# Altium PCB VESC.PcbDoc (part 3 of 3)
Units mm, origin at the board's own origin, x right, y up, seen from the top; angles counter-clockwise.
Board outline 74.1 x 118 mm, 2 copper layers (Component Side, Bottom Layer), stack 1.571 mm thick; 186 components, 177 nets, 891 pads, 378 vias.
Unrouted connection lines stored in the file: 5.
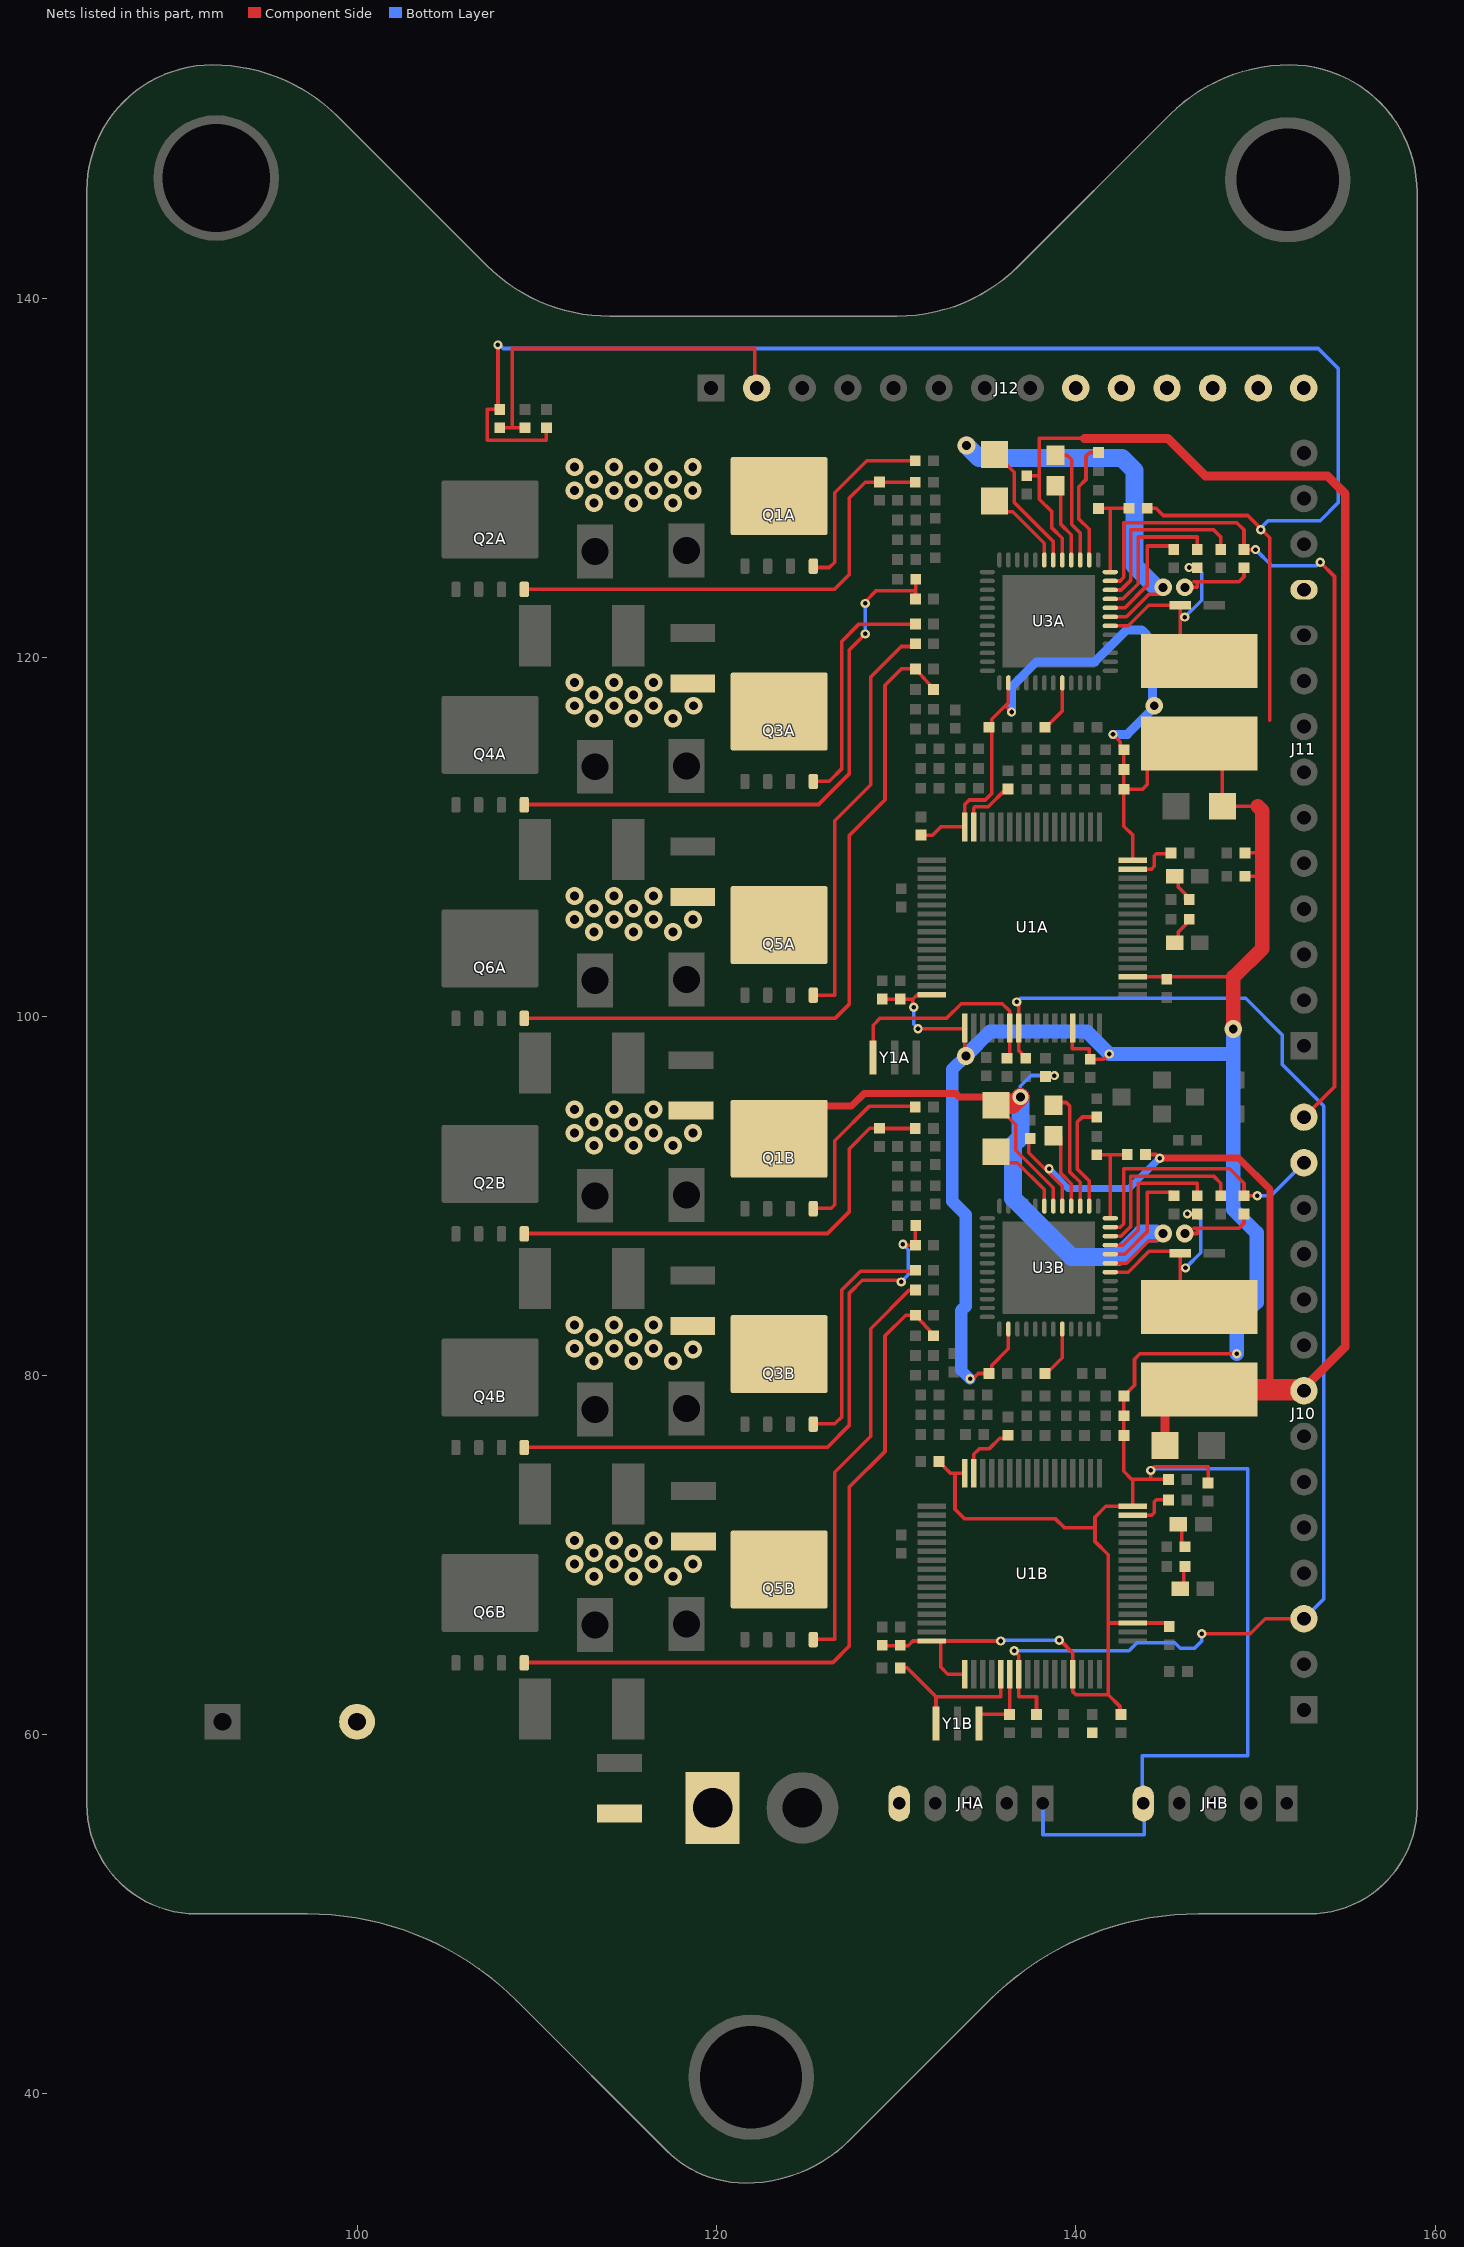
[diagram p3: the nets of this part, all layers, seen from the top]

## Via types
v1: diameter 0.52, hole 0.254, Component Side to Bottom Layer, tented both sides, 205 vias
v2: diameter 1, hole 0.5, Component Side to Bottom Layer, tented both sides, 170 vias
v3: diameter 0.9, hole 0.5, Component Side to Bottom Layer, tented both sides, 3 vias

## Nets (pads, with @x,y where several pads share a name; then routed paths per layer and width w, separated by ;. In a path a pad name is that pad's centre, name@x,y a point inside that pad or via, vN(x,y) a via of type N, cw(c..) or ccw(c..) an arc to the next point about the centre after c; other vN are vias at no path point) (continued)
NetC1B_1: C1B.1 U1B.5 Y1B.3 | length 9.2
  Component Side w0.2: C1B.1@130.208,63.7 130.6,63.7 132.2,62.1 ; Y1B.3@132.2,60.4 132.2,62.1 ; U1B.5@135.81,63.35 135.81,62.1 132.2,62.1
NetC2A_1: C2A.1 U1A.6 Y1A.1 | length 12.7
  Component Side w0.2: Y1A.1@128.7,97.4 128.7,99.5 129.1,99.9 132.8,99.9 133.6,100.7 135.9,100.7 136.31,100.29 U1A.6@136.31,99.35 136.31,98.008 ; C2A.1@136.21,97.808 C2A.1@136.26,97.758
NetC2B_1: C2B.1 U1B.6 Y1B.1 | length 4.4
  Component Side w0.2: Y1B.1@134.6,60.65 134.6,61.108 C2B.1@136.3,61.108 ; C2B.1@136.31,61.108 U1B.6@136.31,63.35
NetC11A_1: C11A.1 U1A.31 | length 2.6
  Component Side w0.2: U1A.31@143.16,108.2 144.21,108.2 144.36,108.35 144.36,108.95 144.468,109.058 C11A.1@145.06,109.058
NetC11B_1: C11B.1 U1B.31 | length 2.6
  Component Side w0.2: U1B.31@143.16,72.2 144.21,72.2 144.36,72.35 144.36,72.95 144.468,73.058 C11B.1@145.06,73.058
NetC18A_1: C18A.1 U3A.2 | length 6.9
  Component Side w0.2: U3A.2@140.735,125.425 140.735,127.125 140.16,127.7 140.16,129.5 140.56,129.9 140.56,131.208 140.76,131.408 C18A.1@141.16,131.408
NetC18B_1: C18B.1 U3B.2 | length 7
  Component Side w0.2: 140.735,90.25 U3B.2@140.735,89.425 140.735,90.825 140.06,91.5 140.06,94.092 140.36,94.392 C18B.1@141.16,94.392
NetC19A_1: C19A.1 U3A.3 | length 6.8
  Component Side w0.2: C19A.1@138.86,131.25 139.51,131.25 139.76,131 139.76,127.4 140.235,126.925 U3A.3@140.235,125.425
NetC19A_2: C19A.2 U3A.4 | length 4.4
  Component Side w0.2: C19A.2@139.16,129.55 139.16,127.4 139.735,126.825 U3A.4@139.735,125.425
NetC19B_1: C19B.1 U3B.3 | length 6.8
  Component Side w0.2: C19B.1@138.76,95.2 139.46,95.2 139.66,95 139.66,91.325 140.235,90.75 U3B.3@140.235,89.425
NetC19B_2: C19B.2 U3B.4 | length 4.1
  Component Side w0.2: C19B.2@139.16,93.3 139.16,91.242 139.735,90.667 U3B.4@139.735,89.425
NetC20A_2: C20A.2 U3A.7 | length 4.5
  Component Side w0.2: C20A.2@135.552,128.455 135.907,128.1 136.485,128.1 138.235,126.35 U3A.7@138.235,125.425
NetC20B_2: C20B.2 U3B.7 | length 4.5
  Component Side w0.2: C20B.2@135.552,92.455 136.157,91.85 136.735,91.85 138.235,90.35 U3B.7@138.235,89.425
NetC21A_1: C21A.1 U3A.45 | length 9
  Component Side w0.2: U3A.45@141.91,123.25 142.61,123.25 143.46,124.1 143.46,126.7 146.76,126.7 ; C21A.1@146.76,126 146.76,126.7 ; C21A.1@146.76,126.2 146.76,126.7
NetC21A_2: C21A.2 D3A.2 L1A.1 U3A.42 | length 9.8
  Component Side w0.2: U3A.42@141.91,121.75 142.91,121.75 144.06,122.9 D3A.2@145.81,122.9 L1A.1@145.81,121.15
  Bottom Layer w0.2: v1(146.06,122.24) 147,123.18 147,124.7 146.7,125 v1(146.3,125)
NetC21B_1: C21B.1 U3B.45 | length 9
  Component Side w0.2: U3B.45@141.91,87.25 142.61,87.25 143.46,88.1 143.46,90.7 146.76,90.7 ; C21B.1@146.76,90 146.76,90.7 ; C21B.1@146.76,90.2 146.76,90.7
NetC21B_2: C21B.2 D3B.2 L1B.1 U3B.42 | length 10.6
  Component Side w0.2: U3B.42@141.91,85.75 142.91,85.75 144.06,86.9 145.81,86.9 L1B.1@145.81,85.15 ; v1@146.2,89.1 146.308,88.992 C21B.2@146.76,88.992
  Bottom Layer w0.2: v1(146.1,85.98) 146.95,86.83 146.95,88.65 146.61,88.99 v1(146.21,88.99)
NetC22A_2: C22A.2 U3A.44 | length 6.5
  Component Side w0.2: U3A.44@141.91,122.75 142.71,122.75 143.96,124 143.96,126.2 145.36,126.2 C22A.2@145.56,126
NetC22B_2: C22B.2 U3B.44 | length 6.5
  Component Side w0.2: U3B.44@141.91,86.75 142.71,86.75 143.96,88 143.96,90.2 145.36,90.2 C22B.2@145.56,90
NetC30A_1: C30A.1 U1A.47 | length 3.4
  Component Side w0.2: U1A.47@134.31,110.55 134.31,111.6 134.376,111.666 135.11,111.666 136.102,112.658 C30A.1@136.21,112.658
NetC30B_1: C30B.1 U1B.47 | length 3.4
  Component Side w0.2: U1B.47@134.31,74.55 134.31,75.6 134.61,75.9 135.15,75.9 135.75,76.5 136.052,76.5 C30B.1@136.21,76.658
NetD1A_1: D1A.1 R32A.1 | length 1.1
  Component Side w0.2: D1A.1@145.56,104.35 145.7,104.49 145.7,104.7 R32A.1@146.209,105.209
NetD1B_1: D1B.1 R32B.1 | length 0.9
  Component Side w0.2: D1B.1@146,68.45 146,69.19 146.068,69.258 R32B.1@146.068,69.35
NetD2A_1: D2A.1 R31A.1 | length 1.3
  Component Side w0.2: D2A.1@145.7,107.6 145.7,107.2 146.1,106.8 R31A.1@146.1,106.482
NetD2B_1: D2B.1 R31B.1 | length 1.5
  Component Side w0.2: D2B.1@145.56,71.55 145.9,71.55 145.9,70.618 R31B.1@146.068,70.45
NetQ1A_4: Q1A.4 R1A.2 | length 10.4
  Component Side w0.2: Q1A.4@125.365,125 126.26,125 126.56,125.3 126.56,129.16 128.35,130.95 R1A.2@131.044,130.95 R1A.2@131.052,130.95
NetQ1B_4: Q1B.4 R1B.2 | length 10.5
  Component Side w0.2: Q1B.4@125.365,88.98 Q1B.4@125.365,89.28 125.385,89.3 126.36,89.3 126.56,89.5 126.56,93.06 128.5,95 130.994,95 R1B.2@131.044,94.95 R1B.2@131.052,94.95
NetQ2A_4: Q2A.4 R2A.2 R7A.2 | length 26.8
  Component Side w0.2: Q2A.4@109.265,123.7 109.365,123.8 126.56,123.8 127.36,124.6 127.36,128.86 128.258,129.758 R7A.2@129.052,129.758 129.06,129.75 R2A.2@131.044,129.75
NetQ2B_4: Q2B.4 R2B.2 R7B.2 | length 26.6
  Component Side w0.2: Q2B.4@109.265,87.6 109.265,87.9 126.16,87.9 127.36,89.1 127.36,92.6 128.518,93.758 R7B.2@129.052,93.758 129.06,93.75 R2B.2@131.044,93.75
NetQ3A_4: Q3A.4 R3A.2 | length 13.7
  Component Side w0.2: Q3A.4@125.365,112.98 125.485,113.1 126.26,113.1 126.96,113.8 126.96,120.9 127.91,121.85 R3A.2@131.052,121.85 R3A.2@131.152,121.95
NetQ3B_4: Q3B.4 R3B.2 | length 13.8
  Component Side w0.2: Q3B.4@125.365,76.98 125.365,77.3 126.56,77.3 126.96,77.7 126.96,84.76 128,85.8 R3B.2@131.002,85.8 ; R3B.2@131.052,85.85 R3B.2@131.152,85.95
NetQ4A_4: Q4A.4 R4A.2 R8A.2 | length 33.3
  Component Side w0.2: Q4A.4@109.265,111.8 125.66,111.8 127.36,113.5 127.36,120.4 v1(128.26,121.3) ; v1@128.26,123.1 128.86,123.7 131.052,123.7 R4A.2@131.052,123.25 131.068,123.25 R8A.2@131.068,124.35
  Bottom Layer w0.2: v1(128.26,121.3) v1(128.26,123)
NetQ4B_4: Q4B.4 R4B.2 R8B.2 | length 33.6
  Component Side w0.2: Q4B.4@109.265,75.8 109.465,76 126.16,76 127.36,77.2 127.36,84.56 128.1,85.3 130.16,85.3 v1(130.26,85.2) v1@130.26,85.1 ; v1@130.36,87.2 130.41,87.25 R4B.2@131.052,87.25 131.052,88.334 R8B.2@131.068,88.35
  Bottom Layer w0.2: v1(130.26,85.2) 130.66,85.6 130.66,87 v1(130.36,87.3)
NetQ5A_4: Q5A.4 R5A.2 | length 23.1
  Component Side w0.2: Q5A.4@125.365,101.18 126.56,101.18 126.56,110.9 128.56,112.9 128.56,118.9 130.26,120.6 131.102,120.6 R5A.2@131.152,120.65
NetQ5B_4: Q5B.4 R5B.2 | length 22.9
  Component Side w0.2: Q5B.4@125.365,65.18 125.485,65.3 126.56,65.3 126.56,74.6 128.56,76.6 128.56,82.6 130.71,84.75 R5B.2@131.052,84.75 ; R5B.2@131.052,84.65 R5B.2@131.152,84.65
NetQ6A_4: Q6A.4 R6A.2 R9A.2 | length 40.3
  Component Side w0.2: Q6A.4@109.265,99.9 110.36,99.9 126.6,99.9 127.36,100.66 127.36,110.06 129.36,112.06 129.36,118.45 130.26,119.35 130.752,119.35 ; R6A.2@131.068,119.333 R9A.2@132.06,118.25
NetQ6B_4: Q6B.4 R6B.2 R9B.2 | length 40.3
  Component Side w0.2: Q6B.4@109.265,63.9 109.365,64 126.46,64 127.36,64.9 127.36,73.76 129.36,75.76 129.36,82.2 130.51,83.35 R6B.2@131.052,83.35 131.068,83.333 R9B.2@132.06,82.25
NetR33A_2: R33A.2 R34A.1 U3A.48 | length 5.2
  Component Side w0.2: R33A.2@141.26,128.3 141.91,128.3 ; U3A.48@141.91,124.75 141.91,128.3 ; R34A.1@142.952,128.3 141.91,128.3
NetR33B_2: R33B.2 R34B.1 U3B.48 | length 5.4
  Component Side w0.2: R33B.2@141.06,92.292 R34B.1@142.852,92.292 ; U3B.48@141.91,88.75 141.91,92.2 ; R34B.1@142.852,92.2 R34B.1@142.952,92.3
NetR36A_1: R36A.1 U3A.46 | length 10
  Component Side w0.2: U3A.46@141.91,123.75 142.51,123.75 143.06,124.3 143.06,127.1 147.66,127.1 148.06,126.7 R36A.1@148.06,126
NetR36B_1: R36B.1 U3B.46 | length 10
  Component Side w0.2: U3B.46@141.91,87.75 142.51,87.75 143.06,88.3 143.06,91.1 147.66,91.1 148.06,90.7 R36B.1@148.06,90
NetR37A_1: R37A.1 U3A.32 | length 2.9
  Component Side w0.2: R37A.1@138.276,116.05 138.918,116.692 139.235,117.009 U3A.32@139.235,118.575
NetR37B_1: R37B.1 U3B.32 | length 3
  Component Side w0.2: R37B.1@138.276,80.05 138.276,80.2 138.46,80.2 139.235,80.975 U3B.32@139.235,82.575
NRST: C3A.1 C3B.1 J10.3 U1A.7 U1B.7 | length 75.4
  Component Side w0.2: v1@136.6,64.6 136.81,64.39 U1B.7@136.81,63.35 136.81,62.1 137.8,62.1 C3B.1@137.8,61.108 ; v1(136.7,100.8) 136.81,100.69 U1A.7@136.81,99.35 136.81,98.09 137.142,97.758 C3A.1@137.36,97.758 ; U1B.7@136.802,63.65 U1B.7@136.802,63.825 ; U1A.7@136.802,99.65 U1A.7@136.802,99.825 ; v1(147,65.6) 149.7,65.6 150.54,66.44 J10.3@152.7,66.44
  Bottom Layer w0.2: v1(136.56,64.65) 142.95,64.65 143.4,65.1 145.5,65.1 145.8,64.8 146.6,64.8 147,65.2 v1(147,65.6) ; v1(136.7,100.8) 136.9,101 149.45,101 151.5,98.95 151.5,97.3 153.8,95 153.8,67.54 J10.3@152.7,66.44
NTC_M: J12.2 R10.1 R11.2 | length 21.4
  Component Side w0.2: R10.1@107.9,132.792 108.6,132.792 ; R11.2@109.2,132.792 108.6,132.792 ; J12.2@122.1,135 122.1,137.2 108.6,137.2 108.6,132.792
V_SUPPLY: C20A.1 C20B.1 C35A.2 C35B.2 C36A.2 C36B.2 C37A.2 C37B.2 C39.2 J12.9 J12.10 J12.11 J12.12 J12.13 J12.14 JB.2 Q1A.5 Q1A.6 Q1A.7 Q1A.8 Q1A.9@123.46,128.98 Q1B.5 Q1B.6 Q1B.7 Q1B.8 Q1B.9@123.46,93.18 Q3A.5 Q3A.6 Q3A.7 Q3A.8 Q3A.9@123.46,116.98 Q3B.5 Q3B.6 Q3B.7 Q3B.8 Q3B.9@123.46,81.18 Q5A.5 Q5A.6 Q5A.7 Q5A.8 Q5A.9@123.46,105.08 Q5B.5 Q5B.6 Q5B.7 Q5B.8 Q5B.9@123.46,69.18 R35A.2 R35B.2 R38A.2 R38B.2 U3A.6 U3A.43 U3B.6 U3B.43 | length 90.9
  Component Side w0.2: Q1B.9@124.73,94.45 Q1B.9@125.03,94.45 ; Q1B.5@125.365,94.62 Q1B.5@125.365,94.785 ; Q1A.5@125.365,130.62 Q1A.5@125.365,130.785 ; Q1B.9@125.48,92.88 123.46,92.88 Q1B.9@125.03,94.45 ; Q1B.5@125.58,95 Q1B.9@125.03,94.45 ; Q1B.9@125.845,94.785 Q1B.5@125.365,94.785 ; C20A.1@135.552,131.045 135.815,131.045 136.56,130.3 136.56,128.625 138.735,126.45 U3A.6@138.735,125.425 ; C20B.1@135.554,95.048 136.652,93.95 136.652,92.533 138.735,90.45 U3B.6@138.735,89.425 ; U3B.43@141.91,86.25 142.81,86.25 144.06,87.5 144.46,87.5 ; U3A.43@141.91,122.25 142.81,122.25 144.06,123.5 v2@144.8,123.5 ; v2(146.06,87.9) 146.76,87.9 146.76,88.2 ; v2(146.06,123.9) 146.76,123.9 146.76,124.2 ; 146.56,88.2 146.76,88.2 ; 146.56,124.2 146.76,124.2 ; R35B.2@149.36,88.984 149.36,88.484 149.076,88.2 146.76,88.2 ; R35A.2@149.36,124.984 149.36,124.484 149.076,124.2 146.76,124.2 ; Q1B.9@125.03,94.45 Q1B.5@125.365,94.785 ; Q1A.5@125.365,130.785 123.46,128.88 123.94,128.88 125.845,130.785 Q1A.5@125.365,130.785
  Component Side w0.4: Q1B.5@125.58,95 127.5,95 128.2,95.7 133.3,95.7 133.5,95.5 v3(136.9,95.5)
  Component Side w1: C20B.1@135.554,95.048 C20B.1@135.552,95.045 136.445,95.045 v3(136.9,95.5)
  Bottom Layer w0.2: v3(136.9,95.5) 136.9,96.1 137.5,96.7 v1(138.8,96.7)
  Bottom Layer w1: v2(133.9,131.8) 134.6,131.1 142.56,131.1 143.26,130.4 143.26,125.1 v2@144.46,123.9 ; v3(136.9,95.5) 136.9,93.24 136.5,92.84 136.5,89.86 139.76,86.6 142.36,86.6 143.66,87.9 v2@144.46,87.9
  other v2: 113.16,68.8 115.36,68.8 117.56,68.8 112.06,69.5 114.26,69.5 116.46,69.5 118.66,69.5 113.16,70.1 115.36,70.1 112.06,70.8 114.26,70.8 116.46,70.8 113.16,80.8 115.36,80.8 117.56,80.8 118.66,81.45 112.06,81.5 114.26,81.5 116.46,81.5 113.16,82.1 115.36,82.1 112.06,82.8 114.26,82.8 116.46,82.8 144.86,87.9 113.16,92.8 115.36,92.8 117.56,92.8 112.06,93.5 114.26,93.5 116.46,93.5 118.66,93.5 113.16,94.1 115.36,94.1 112.06,94.8 114.26,94.8 116.46,94.8 113.16,104.7 115.36,104.7 117.56,104.7 112.06,105.4 114.26,105.4 116.46,105.4 118.66,105.4 113.16,106 115.36,106 112.06,106.7 114.26,106.7 116.46,106.7 113.16,116.6 115.36,116.6 117.56,116.6 112.06,117.3 114.26,117.3 116.46,117.3 118.7,117.3 113.16,117.9 115.36,117.9 112.06,118.6 114.26,118.6 116.46,118.6 144.86,123.9 113.16,128.6 115.36,128.6 117.55,128.6 112.06,129.3 114.26,129.3 116.46,129.3 118.65,129.3 113.16,129.9 115.36,129.9 117.55,129.9 112.06,130.6 114.26,130.6 116.46,130.6 118.65,130.6
VCC_3V3: C4A.1 C4B.1 C5A.1 C5B.1 C6A.1 C6B.1 C7A.1 C7B.1 C8A.1 C8B.1 C9A.1 C9B.1 C10.2 C10A.1 C10B.1 C33A.1 C34A.1 C34B.1 J11.11 JHA.5 JHB.5 L1A.2 R10.2 R13A.2 R13B.2 R14A.2 R14B.2 R15A.2 R15B.2 R34A.2 U1A.1 U1A.13 U1A.19 U1A.32 U1A.48 U1A.64 U1B.1 U1B.13 U1B.19 U1B.32 U1B.48 U1B.64 U3A.26 U3B.26 | length 336.2
  Component Side w0.2: v1@107.7,137.5 v1(107.8,137.4) 107.8,133.808 107.2,133.808 107.2,132.1 110.5,132.1 C10.2@110.5,132.792 ; C4B.1@129.21,64.942 130.06,64.942 130.652,64.942 130.91,65.2 U1B.64@131.96,65.2 ; C4A.1@129.21,100.942 C7A.1@130.06,100.942 ; C7A.1@130.21,100.958 130.852,100.958 ; v1@130.91,100.55 130.91,100.958 131.152,101.2 U1A.64@131.26,101.2 ; v1(131.2,99.3) 133.86,99.3 U1A.1@133.81,99.35 v2@133.81,97.85 ; U1A.64@131.24,101.18 U1A.64@131.26,101.2 ; C6A.1@131.36,110.092 132.002,110.092 132.46,110.55 U1A.48@133.81,110.55 133.81,111.8 134.06,112.05 134.95,112.05 135.31,112.41 135.31,115.892 C34A.1@135.06,116.142 ; U1A.64@131.96,101.2 U1A.64@131.26,101.2 ; C6B.1@132.368,75.2 132.368,75.192 133.01,74.55 U1B.48@133.81,74.55 ; 133.26,74.55 133.26,72.54 133.8,72 138.86,72 139.36,71.5 141.06,71.5 ; U1B.1@133.81,63.35 132.86,63.35 132.46,63.75 132.46,65.2 U1B.64@131.96,65.2 ; v1@134.16,79.7 134.56,80.1 C34B.1@135.102,80.1 ; C34A.1@135.068,116.042 135.31,116.284 135.31,116.55 136.06,117.3 ; C34B.1@135.152,80.1 C34B.1@135.126,80.1 ; C34B.1@135.31,79.892 135.127,80.075 135.114,80.088 C34B.1@135.102,80.1 ; v1(135.8,65.2) U1B.64@131.96,65.2 ; U3B.26@136.235,82.575 136.235,81.475 135.31,80.55 135.31,80.284 C34B.1@135.126,80.1 ; U3A.26@136.235,118.575 136.235,117.475 136.06,117.3 ; v1@136.26,117.1 136.06,117.3 ; v1@139.06,65.2 139.16,65.2 139.81,64.55 U1B.13@139.81,63.35 139.81,62.39 140,62.2 141.8,62.2 ; U1A.13@139.802,99.825 139.802,98.2 140.75,98.2 ; C5A.1@140.75,97.658 140.75,98.2 ; v1(141.85,97.9) 141.55,97.6 140.75,97.6 140.75,98.2 ; v1(142.06,115.7) 142.46,115.3 142.46,115.058 R15A.2@142.668,114.85 R14A.2@142.668,113.75 R13A.2@142.668,112.65 ; C5B.1@142.45,61.108 142.45,61.55 141.8,62.2 ; R13A.2@142.66,112.642 R13A.2@142.668,112.65 ; U1A.19@143.16,102.2 144.918,102.2 C8A.1@145.06,102.058 145.202,102.2 148.8,102.2 ; U1A.32@143.16,108.7 143.16,110.1 142.668,110.592 R13A.2@142.668,112.65 ; R34A.2@143.968,128.3 144.46,128.3 144.86,127.9 149.56,127.9 150.8,126.66 150.8,116.5 ; C8B.1@145.06,66.058 144.918,66.2 U1B.19@143.16,66.2 141.8,66.2 ; C9B.1@145.152,74.2 144.16,74.2 ; L1A.2@147.16,115.2 145.26,115.2 143.96,113.9 143.96,112.9 143.71,112.65 R13A.2@142.668,112.65 ; C10B.1@147.36,74.008 147.36,74.9 144.36,74.9 v1(144.16,74.7) 144.16,74.2 ; C33A.1@148.155,111.7 L1A.2@148.155,113.905 ; C33A.1@148.66,111.3 148.66,111.7 150.118,111.7 ; v1(148.96,81.2) 143.56,81.2 143.26,80.9 143.26,79.442 R15B.2@142.668,78.85 R14B.2@142.668,77.75 R13B.2@142.668,76.65 142.66,76.642 142.66,74.65 143.11,74.2 143.21,74.2 ; C9A.1@149.368,107.8 150.368,107.8 ; C10A.1@149.368,109.1 150.268,109.1 ; C34B.1@135.102,80.1 C34B.1@135.126,80.1 ; 141.06,71.5 141.06,70.74 141.8,70 141.8,66.2 ; 141.06,71.5 141.06,72.1 141.66,72.7 U1B.32@143.16,72.7 143.16,74.15 143.21,74.2 ; 141.8,62.2 141.8,66.2 ; 143.21,74.2 144.16,74.2
  Component Side w0.8: v2(148.76,99.3) 148.76,102.2 ; 148.8,102.2 150.368,103.768 150.368,107.8 150.368,111.45 150.118,111.7
  Bottom Layer w0.2: v1(107.8,137.4) 107.9,137.4 108.1,137.2 153.5,137.2 154.6,136.1 154.6,128.6 153.6,127.6 150.7,127.6 v1@150.3,127.2 ; v1(130.96,100.5) 130.96,99.56 131.2,99.32 v1(131.2,99.3) ; v1(135.8,65.2) 135.85,65.25 v1(139.06,65.25) ; 138.16,56.2 138.16,54.4 143.8,54.4 143.8,55.44 143.7,55.54 143.7,58.8 149.56,58.8 149.56,74.8 v1@144.36,74.8 ; v1(144.16,74.7) v1@144.16,74.8
  Bottom Layer w0.5: v1(136.41,116.95) 136.41,118.36 137.8,119.75 141.05,119.75 142.825,121.525 143.66,121.525 144.26,120.925 144.26,117.1 142.86,115.7 v1(142.06,115.7)
  Bottom Layer w0.6: 133.6,80.3 v1(134.1,79.8)
  Bottom Layer w0.7: 133.6,80.3 133.6,83.6 133.86,83.86 133.86,88.94 133.1,89.7 133.1,97.04 v2(133.86,97.8)
  Bottom Layer w0.8: v2(133.86,97.8) 135.21,99.15 140.6,99.15 v1(141.85,97.9) 148.66,97.9 148.76,97.8 ; v2(148.76,99.3) 148.76,97.8 ; v1(148.96,81.2) 148.96,82.96 150.06,84.06 150.06,87.94 148.76,89.24 148.76,97.8
  other v1: 150.3,127.1
  other v2: 144.36,117.3
VCC_3V3_SD: J10.14 R35A.1 U3A.47 | length 48.6
  Component Side w0.2: U3A.47@141.91,124.25 142.46,124.25 142.66,124.45 142.66,127.5 148.96,127.5 149.36,127.1 R35A.1@149.36,126 v1@150.1,126 ; J10.14@152.7,94.38 154.4,96.08 154.4,124.5 v1(153.6,125.3)
  Bottom Layer w0.2: v1(150,126) 150.9,125.1 153.4,125.1 v1(153.6,125.3)
VCC_12V: C33B.1 C38A.1 C38B.1 J10.8 L1B.2 R34B.2 U3A.5 U3B.5 | length 121
  Component Side w0.2: C38A.1@137.26,130.108 137.952,130.108 ; C38B.1@137.36,93.292 137.36,92.4 139.235,90.525 U3B.5@139.235,89.425 ; U3A.5@139.235,125.425 139.235,126.625 138.66,127.2 138.66,128.1 137.96,128.8 137.96,132.2 140.46,132.2 ; R34B.2@143.868,92.3 144.46,92.3 v1(144.66,92.1) ; L1B.2@147.06,79.3 150.8,79.3
  Component Side w0.4: v1(144.66,92.1) 149.06,92.1 150.8,90.36 150.8,79.3
  Component Side w0.5: 140.46,132.2 145.1,132.2 147.2,130.1 154,130.1 155,129.1 155,81.59 J10.8@152.71,79.3 ; C33B.1@144.965,76.3 L1B.2@144.965,79.3 ; J10.8@152.17,79.3 J10.8@152.71,79.3 ; J10.8@152.6,79.19 J10.8@152.71,79.3
  Component Side w1.2: L1B.2@146.87,79.19 J10.8@152.6,79.19
  Bottom Layer w0.4: v1@138.48,91.48 139.56,90.4 142.96,90.4 v1(144.66,92.1)
  other v1: 138.5,91.5
VCC_12V_SD: J10.13 R35B.1 U3B.47 | length 15.5
  Component Side w0.2: U3B.47@141.91,88.25 142.46,88.25 142.66,88.45 142.66,91.5 148.56,91.5 149.36,90.7 R35B.1@149.36,90.008 ; R35B.1@149.36,90 R35B.1@149.36,90.008 ; v1@149.908,90.008 R35B.1@149.36,90.008
  Bottom Layer w0.2: v1(150.1,90) 150.86,90 J10.13@152.7,91.84
pads on no net: Q1A.9@121.087,127.07 Q1A.9@122.13,127.365 Q1A.9@122.13,128.515 Q1A.9@122.13,129.665 Q1A.9@123.46,127.365 Q1A.9@123.46,128.65 Q1A.9@123.46,128.515 Q1A.9@123.46,129.665 Q1A.9@124.79,127.365 Q1A.9@124.79,128.515 Q1A.9@124.79,129.665 Q1A.9@125.832,127.07 Q1B.9@121.087,91.27 Q1B.9@122.13,91.565 Q1B.9@122.13,92.715 Q1B.9@122.13,93.865 Q1B.9@123.46,91.565 Q1B.9@123.46,92.85 Q1B.9@123.46,92.715 Q1B.9@123.46,93.865 Q1B.9@124.79,91.565 Q1B.9@124.79,92.715 Q1B.9@124.79,93.865 Q1B.9@125.832,91.27 Q2A.9@104.988,125.77 Q2A.9@106.03,126.065 Q2A.9@106.03,127.215 Q2A.9@106.03,128.365 Q2A.9@107.36,126.065 Q2A.9@107.36,127.35 Q2A.9@107.36,127.215 Q2A.9@107.36,128.365 Q2A.9@108.69,126.065 Q2A.9@108.69,127.215 Q2A.9@108.69,128.365 Q2A.9@109.733,125.77 Q2B.9@104.988,89.87 Q2B.9@106.03,90.165 Q2B.9@106.03,91.315 Q2B.9@106.03,92.465 Q2B.9@107.36,90.165 Q2B.9@107.36,91.45 Q2B.9@107.36,91.315 Q2B.9@107.36,92.465 Q2B.9@108.69,90.165 Q2B.9@108.69,91.315 Q2B.9@108.69,92.465 Q2B.9@109.733,89.87 Q3A.9@121.087,115.07 Q3A.9@122.13,115.365 Q3A.9@122.13,116.515 Q3A.9@122.13,117.665 Q3A.9@123.46,115.365 Q3A.9@123.46,116.65 Q3A.9@123.46,116.515 Q3A.9@123.46,117.665 Q3A.9@124.79,115.365 Q3A.9@124.79,116.515 Q3A.9@124.79,117.665 Q3A.9@125.832,115.07 Q3B.9@121.087,79.27 Q3B.9@122.13,79.565 Q3B.9@122.13,80.715 Q3B.9@122.13,81.865 Q3B.9@123.46,79.565 Q3B.9@123.46,80.85 Q3B.9@123.46,80.715 Q3B.9@123.46,81.865 Q3B.9@124.79,79.565 Q3B.9@124.79,80.715 Q3B.9@124.79,81.865 Q3B.9@125.832,79.27 Q4A.9@104.988,113.77 Q4A.9@106.03,114.065 Q4A.9@106.03,115.215 Q4A.9@106.03,116.365 Q4A.9@107.36,114.065 Q4A.9@107.36,115.35 Q4A.9@107.36,115.215 Q4A.9@107.36,116.365 Q4A.9@108.69,114.065 Q4A.9@108.69,115.215 Q4A.9@108.69,116.365 Q4A.9@109.733,113.77 Q4B.9@104.988,77.97 Q4B.9@106.03,78.265 Q4B.9@106.03,79.415 Q4B.9@106.03,80.565 Q4B.9@107.36,78.265 Q4B.9@107.36,79.55 Q4B.9@107.36,79.415 Q4B.9@107.36,80.565 Q4B.9@108.69,78.265 Q4B.9@108.69,79.415 Q4B.9@108.69,80.565 Q4B.9@109.733,77.97 Q5A.9@121.087,103.17 Q5A.9@122.13,103.465 Q5A.9@122.13,104.615 Q5A.9@122.13,105.765 Q5A.9@123.46,103.465 Q5A.9@123.46,104.75 Q5A.9@123.46,104.615 Q5A.9@123.46,105.765 Q5A.9@124.79,103.465 Q5A.9@124.79,104.615 Q5A.9@124.79,105.765 Q5A.9@125.832,103.17 Q5B.9@121.087,67.27 Q5B.9@122.13,67.565 Q5B.9@122.13,68.715 Q5B.9@122.13,69.865 Q5B.9@123.46,67.565 Q5B.9@123.46,68.85 Q5B.9@123.46,68.715 Q5B.9@123.46,69.865 Q5B.9@124.79,67.565 Q5B.9@124.79,68.715 Q5B.9@124.79,69.865 Q5B.9@125.832,67.27 Q6A.9@104.988,101.87 Q6A.9@106.03,102.165 Q6A.9@106.03,103.315 Q6A.9@106.03,104.465 Q6A.9@107.36,102.165 Q6A.9@107.36,103.45 Q6A.9@107.36,103.315 Q6A.9@107.36,104.465 Q6A.9@108.69,102.165 Q6A.9@108.69,103.315 Q6A.9@108.69,104.465 Q6A.9@109.733,101.87 Q6B.9@104.988,65.97 Q6B.9@106.03,66.265 Q6B.9@106.03,67.415 Q6B.9@106.03,68.565 Q6B.9@107.36,66.265 Q6B.9@107.36,67.55 Q6B.9@107.36,67.415 Q6B.9@107.36,68.565 Q6B.9@108.69,66.265 Q6B.9@108.69,67.415 Q6B.9@108.69,68.565 Q6B.9@109.733,65.97 U1A.2 U1A.3 U1A.4 U1A.24 U1A.25 U1A.33 U1A.40 U1A.50 U1A.51 U1A.52 U1A.54 U1A.55 U1A.56 U1A.59 U1B.2 U1B.3 U1B.4 U1B.24 U1B.25 U1B.33 U1B.40 U1B.50 U1B.51 U1B.52 U1B.54 U1B.55 U1B.56 U1B.59

## Polygon pours and split planes (outlines as drawn)
V_SUPPLY on Bottom Layer "3 BottomMid-No Net" (solid, remove dead copper, shelved, pour order 1): 119.923,59.726 120.487,59.505 cw(c120.078,58.46) 121.2,58.46 121.2,54.1 112.941,54.1 cw(c112.941,55.407) 112.017,54.483 109.554,56.946 ccw(c107.735,55.128) 107.734,57.7 100.183,57.7 cw(c100.183,59.107) 99.188,58.112 97.212,60.088 cw(c98.449,61.324) 96.7,61.324 96.7,63.281 cw(c98.335,63.281) 97.307,64.553 101.074,67.599 ccw(c96.966,72.68) 103.5,72.68 103.5,127.7 cw(c107,127.7) 107,131.2 119.16,131.2 119.16,60.845 ccw(c120.362,60.845)
GND on Bottom Layer "3 BottomMid-No Net" (solid, remove dead copper, shelved, pour order 2): 128.9,52.5 121.754,52.5 121.8,59.9 120,60.6 120,136.9 132.2,136.9 132.2,133.9 131,133.9 ccw(c131,131.8) 128.9,131.8
GND on Bottom Layer "3 BottomMid-No Net" (solid, remove dead copper, shelved, pour order 4): 131,133.4 154.6,133.4 154.6,53.9 129.46,53.9 129.46,131.86 cw(c131,131.86)
GND on Bottom Layer "3 BottomMid-No Net" (solid, remove dead copper, shelved, pour order 6): 122,53.5 112.783,53.5 cw(c112.783,54.907) 111.788,53.912 109.395,56.305 ccw(c107.476,54.387) 107.476,57.1 100.024,57.1 cw(c100.024,59.09) 98.617,57.683 96.683,59.617 cw(c98.331,61.266) 96,61.266 96,63.372 cw(c97.945,63.371) 96.722,64.884 100.272,67.755 ccw(c95.987,73.052) 102.8,73.052 102.8,127.9 cw(c106.8,127.9) 106.8,131.9 120.594,131.9 120.594,136.9 105.5,136.9 ccw(c105.5,121.869) 90.469,121.869 90.469,62.5 90.469,59 ccw(c92.807,59) 91.154,57.346 95.805,52.695 ccw(c97.724,54.614) 97.724,51.9 105.759,51.9 cw(c105.759,51.076) 106.341,51.659 108.546,49.454 ccw(c109.883,50.79) 109.883,48.9 126.867,48.9 ccw(c126.867,51.033) 129,51.033 129,53.5
V_SUPPLY on Bottom Layer "V" (solid, remove dead copper, shelved, pour order 8): 139.2,133.9 153.7,133.9 153.7,136 ccw(c152.8,136) 152.8,136.9 140.3,136.9 ccw(c140.3,135.8) 139.2,135.8
VCC_3V3 on Component Side "3 BottomMid-No Net" (solid, remove dead copper, shelved, pour order 3): 147.06,116.7 150.5,116.7 150.5,124.8 153.5,124.8 153.5,110.4 149.26,110.4 147.06,112.6
GND on Component Side "3 BottomMid-No Net" (solid, remove dead copper, shelved, pour order 5): 128.36,132.4 155,132.4 cw(c155,130.9) 156.5,130.9 156.5,55.4 cw(c155,55.4) 155,53.9 129.46,53.9 129.46,61.6 128.36,62.7
V_SUPPLY on Component Side "3 BottomMid-No Net" (solid, remove dead copper, shelved, pour order 0): 111.55,136.9 153,136.9 cw(c153,135.3) 154.6,135.3 154.6,132.8 137.068,132.8 137.068,132.2 136.06,132.2 136.06,131.2 111.55,131.2

## Other copper
Component Side:
  rectangle net VCC_3V3: 150.6,122.6 153.5,124.8
  rectangle net NetC21B_2: 145.56,85.1 146.06,86.9
  rectangle net V_SUPPLY: 144.36,87.4 146.86,88.4
  rectangle net NetC21A_2: 145.56,121.1 146.06,122.9
  rectangle net VCC_3V3: 147.16,113.4 150.46,116.7
  rectangle net V_SUPPLY: 144.36,123.4 146.86,124.4
  rectangle net VCC_3V3: 143.76,116.3 144.96,117.9
  region net MA_PA_AGND: 126.16,122.6 115.56,122.6 115.56,119.5 126.16,119.5
  region net MA_PB_AGND: 126.16,110.7 115.76,110.7 115.76,107.6 126.16,107.6
  region net MA_PC_AGND: 126.16,98.8 115.56,98.8 115.56,95.7 126.16,95.7
  region net MB_PC_AGND: 128.26,62.8 115.06,62.8 115.06,59.7 128.26,59.7
  region net MB_PB_AGND: 126.16,74.8 115.66,74.8 115.66,71.7 126.16,71.7
  region net MB_PA_AGND: 126.16,86.8 115.76,86.8 115.76,83.7 126.16,83.7
  rectangle net GND: 121.86,53.9 129.16,62.8
  rectangle net GND: 145.46,117 149.86,118
  rectangle net GND: 147.26,76.4 147.86,77.2
  rectangle net GND: 146.06,77 148.26,77.4
  rectangle net V_SUPPLY: 113.36,54.7 120.26,56.6
  rectangle net GND: 129.16,59.6 130.16,62.8
  region net V_SUPPLY: 111.56,69.3 112.56,68.3 119.5,68.3 120.8,67 121.21,67 121.21,71.3 111.56,71.3
  region net V_SUPPLY: 111.56,81.3 112.56,80.3 119.5,80.3 120.8,79 121.21,79 121.21,83.3 111.56,83.3
  region net V_SUPPLY: 111.56,93.3 112.56,92.3 119.5,92.3 120.8,91 121.21,91 121.21,95.3 111.56,95.3
  region net V_SUPPLY: 111.56,105.2 112.56,104.2 119.5,104.2 120.8,102.9 121.21,102.9 121.21,107.2 111.56,107.2
  region net V_SUPPLY: 111.56,129.1 112.56,128.1 119.5,128.1 120.8,126.8 126.2,126.8 126.2,131.5 111.56,131.5
  region net MA_PHASE_C: 119.06,103.8 120.36,102.5 124.66,102.5 124.66,100.3 109.96,100.3 109.96,101 104.66,101 104.66,107.2 111.06,107.2 111.06,105 112.26,103.8
  region net MA_PC_SOURCE: 109.56,95.7 104.66,95.7 104.66,100.4 108.56,100.4 108.56,99.1 109.56,99.1
  region net MA_PB_SOURCE: 109.56,107.6 104.66,107.6 104.66,112.3 108.56,112.3 108.56,111 109.56,111
  region net V_SUPPLY: 111.56,117.1 112.56,116.1 119.5,116.1 120.8,114.8 121.21,114.8 121.21,119.1 111.56,119.1
  region net MA_PHASE_B: 120.36,114.4 124.66,114.4 124.66,112.2 109.96,112.2 109.96,112.9 104.66,112.9 104.66,119.1 111.06,119.1 111.06,116.9 112.26,115.7 119.06,115.7
  region net MA_PHASE_A: 119.06,127.7 120.36,126.4 124.66,126.4 124.66,124.2 109.96,124.2 109.96,124.9 104.66,124.9 104.66,131.6 111.06,131.6 111.06,128.9 112.26,127.7
  region net MA_PA_SOURCE: 109.56,119.5 104.66,119.5 104.66,124.2 108.56,124.2 108.56,122.9 109.56,122.9
  region net MB_PHASE_A: 119.06,91.8 120.36,90.5 124.66,90.5 124.66,88.3 109.96,88.3 109.96,89 104.66,89 104.66,95.3 111.06,95.3 111.06,93 112.26,91.8
  region net MB_PA_SOURCE: 109.56,83.7 104.66,83.7 104.66,88.4 108.56,88.4 108.56,87.1 109.56,87.1
  region net MB_PHASE_B: 119.06,79.9 120.36,78.6 124.66,78.6 124.66,76.4 109.96,76.4 109.96,77.1 104.66,77.1 104.66,83.3 111.06,83.3 111.06,81.1 112.26,79.9
  region net MB_PB_SOURCE: 109.56,71.7 104.66,71.7 104.66,76.4 108.56,76.4 108.56,75.1 109.56,75.1
  region net MB_PHASE_C: 119.06,67.9 120.36,66.6 124.66,66.6 124.66,64.4 109.96,64.4 109.96,65.1 104.66,65.1 104.66,71.3 111.06,71.3 111.06,69.1 112.26,67.9
  region net MB_PC_SOURCE: 109.56,59.7 104.66,59.7 104.66,64.4 108.56,64.4 108.56,63.1 109.56,63.1
  region net MB_PC_AGND: 115.76,58.2 115.76,60.4 114.16,60.4 113.36,59.6 113.36,58.2
  region net MB_PHASE_C: 105,71.3 103.6,71.3 103.6,76.4 90.5,76.4 90.5,65.1 105,65.1
  region net MB_PHASE_B: 105,83.3 103.6,83.3 103.6,88.4 90.5,88.4 90.5,77.1 105,77.1
  region net MB_PHASE_A: 105,95.3 103.6,95.3 103.6,100.35 90.5,100.35 90.5,89 105,89
  region net MA_PHASE_C: 105,107.2 103.6,107.2 103.6,112.3 90.5,112.3 90.5,101 105,101
  region net MA_PHASE_B: 105,119.1 103.6,119.1 103.6,124.2 90.5,124.2 90.5,112.9 105,112.9
  region net MA_PHASE_A: 111.1,131.8 106.8,131.8 106.8,136.9 90.5,136.9 90.5,124.9 111.1,124.9
  region net V_SUPPLY: 99.903,61.997 99.92,61.997 cw(c99.92,60.591) 100.915,61.585 102.883,59.617 ccw(c105.585,62.319) 105.585,58.497 110.237,58.497 cw(c110.237,55.442) 112.397,57.603 113.403,56.597 114.103,56.597 114.103,54.697 101.103,54.697 cw(c101.102,57.097) 98.703,57.097 98.703,60.797 cw(c99.903,60.797)
Bottom Layer:
  rectangle net V_SUPPLY: 117.8,57.25 121.2,58.4
  rectangle net V_SUPPLY: 144.36,87.4 146.56,88.4
  rectangle net V_SUPPLY: 144.36,123.4 146.65,124.4
  rectangle net GND: 127.96,59.629 130.16,62.8
  region net V_SUPPLY: 116.96,68.7 116.96,72.9 110.76,72.9 110.76,68.7
  region net V_SUPPLY: 116.96,80.7 116.96,84.9 110.76,84.9 110.76,80.7
  region net V_SUPPLY: 116.96,92.7 116.96,96.9 110.76,96.9 110.76,92.7
  region net V_SUPPLY: 116.96,104.5 116.96,108.7 110.76,108.7 110.76,104.5
  region net V_SUPPLY: 116.96,116.4 116.96,120.6 110.76,120.6 110.76,116.4
  region net V_SUPPLY: 116.96,128.5 116.96,131.2 109.86,131.2 109.86,128.5
  rectangle net GND: 122.2,54.429 124.4,57.6
  region net V_SUPPLY: 106.1,61.1 112.388,54.812 ccw(c113.383,55.807) 113.383,54.4 120.4,54.4 120.4,57.9 118.266,57.9 cw(c118.266,60.956) 116.105,58.795 111.655,63.245 cw(c113.481,65.071) 110.898,65.067 110.801,131.2 108.1,131.2 ccw(c108.1,129.169) 106.1,128.812
  region net GND: 127.904,71.256 127.011,72.149 cw(c128.414,73.552) 126.43,73.552 126.43,132.43 cw(c127.9,132.43) 127.9,133.9 137.2,133.9 ccw(c137.2,135) 138.3,135 138.3,135.8 ccw(c137.2,135.8) 137.2,136.9 124.6,136.9 ccw(c124.6,135.9) 123.6,135.9 123.6,134.4 cw(c122.2,134.4) 122.2,133 121.9,133 ccw(c121.9,131.4) 120.3,131.4 120.3,60.889 ccw(c120.861,60.889) 120.664,60.364 122.149,59.807 cw(c121.851,59.012) 122.7,59.011 122.7,53.9 128.56,53.9 128.56,69.672 ccw(c126.321,69.672)
  region net GND: 91.954,57.646 96.476,53.124 ccw(c98.055,54.704) 98.055,52.47 106.09,52.47 cw(c106.09,51.166) 107.012,52.088 109.288,49.812 ccw(c110.078,50.602) 110.078,49.485 126.985,49.485 ccw(c126.985,51.06) 128.56,51.06 128.56,54.2 122.7,54.2 122.7,53.1 cw(c122.07,53.1) 122.07,52.47 112.997,52.47 cw(c112.997,54.562) 111.517,53.083 108.793,55.807 ccw(c107.361,54.375) 107.361,56.4 100.083,56.4 cw(c100.083,58.29) 98.746,56.954 93.6,62.1 91.1,62.1 91.1,59.707 ccw(c94.014,59.707)
  region net V_SUPPLY: 100.1,58.5 107.634,58.5 cw(c107.634,55.927) 109.454,57.746 111.871,55.329 111.871,61 107.071,65.8 106.1,65.8 106.1,64.9 cw(c104.2,64.9) 104.2,63 100.1,63 ccw(c100.1,61.414) 98.514,61.414 98.514,60.086 ccw(c100.1,60.086)

## Silkscreen, mask and mechanical layers (free items; w line width, h text height)
Top Overlay:
  the board outline again, w0.5